# EAGLE board page1 (EAGLE 5.11)
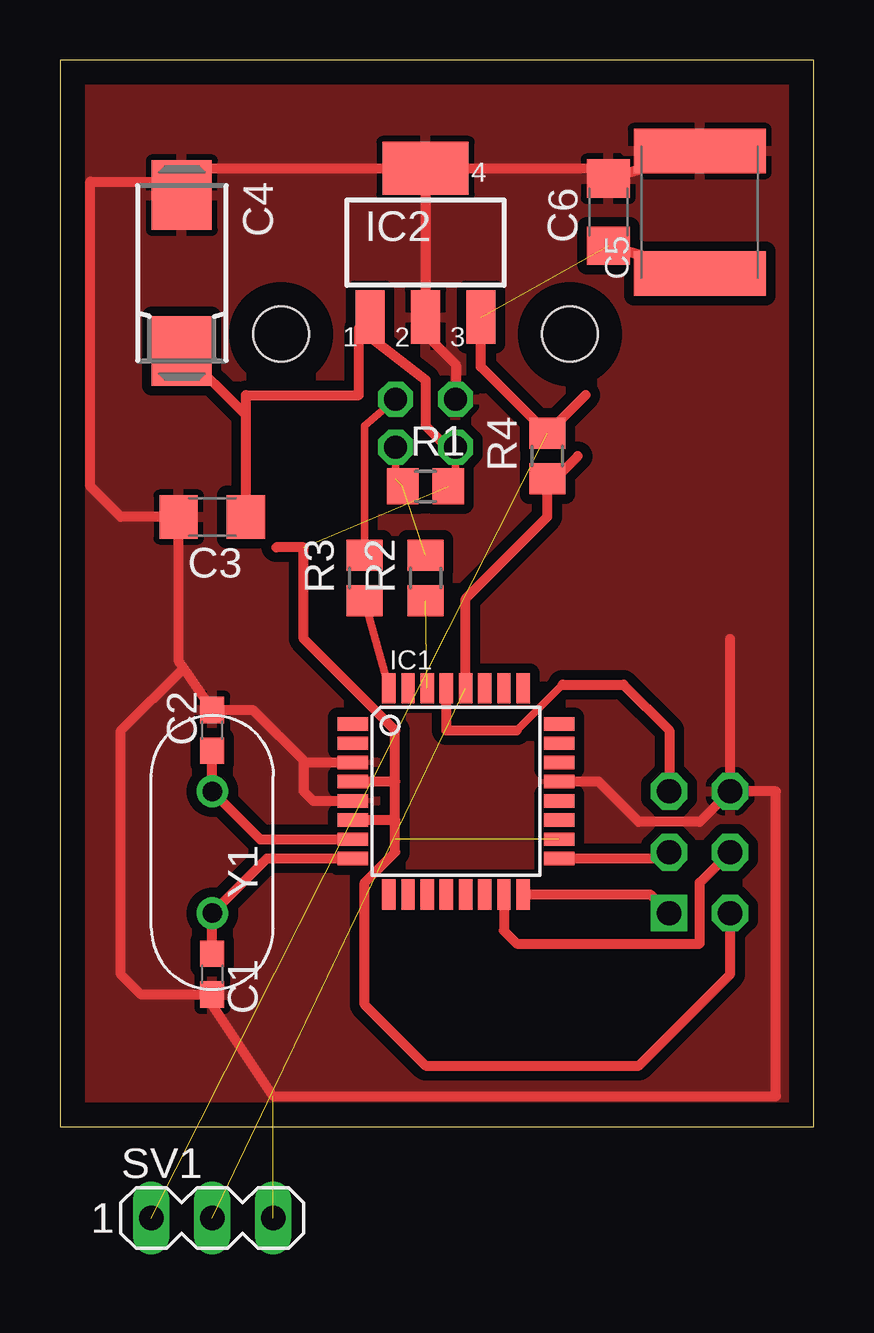
[diagram p0: board, top side]
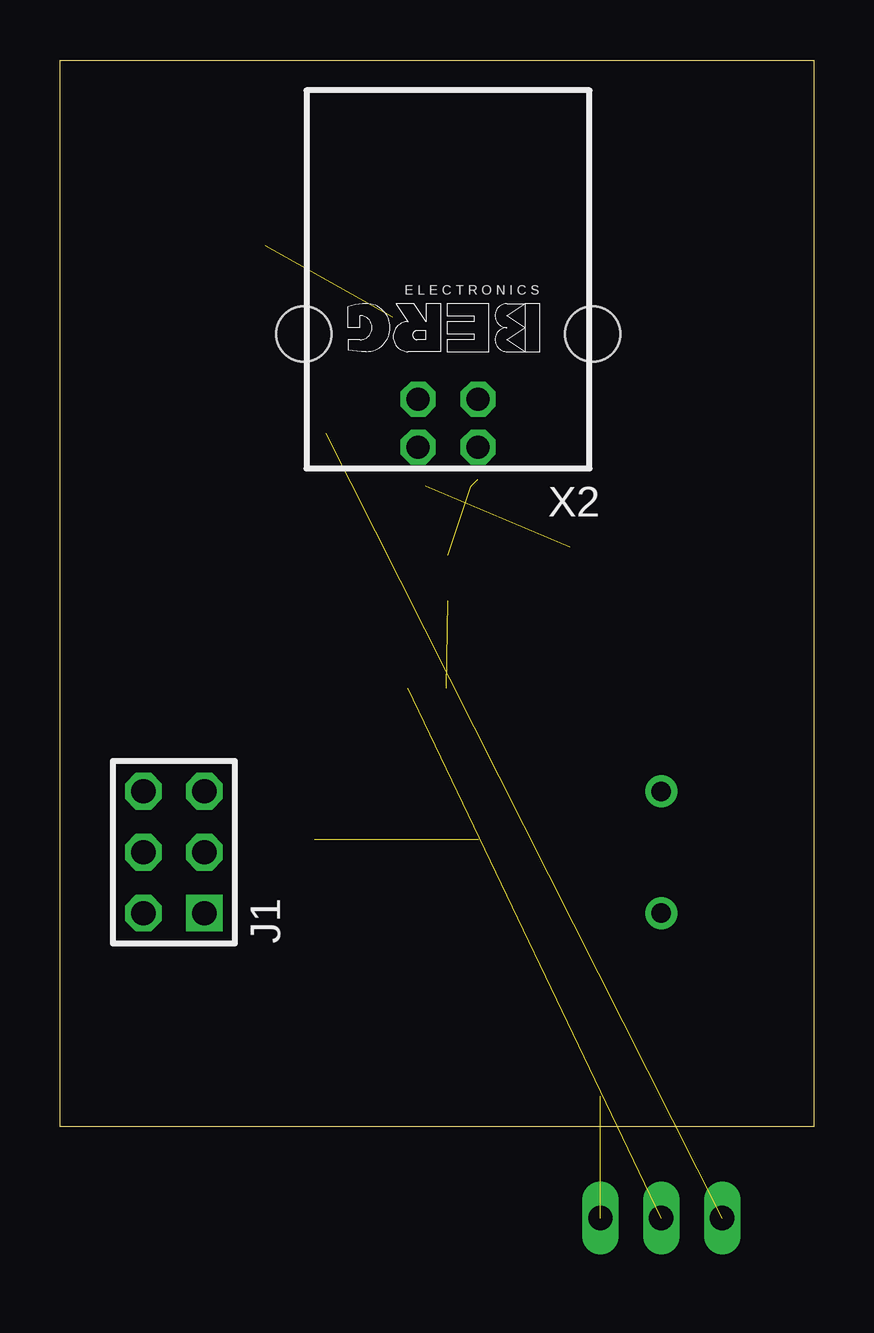
[diagram p1: board, bottom side, seen from below]

Size 31.42 x 44.44 mm. Coordinates in mm from the lower left corner, seen from the top.
Outline: 0,0 31.42,0 31.42,44.44 0,44.44 0,0
Copper layers (1*16): Top 0.035mm / dielectric 1.5mm / Bottom 0.035mm
Design rules "default *": minimum track width 10mil, minimum drill 24mil, track to track 16mil, track to pad 16mil, pad to pad 16mil, via to via 8mil, smd to smd 16mil, copper to edge 40mil, drill to drill 8mil, minimum pad ring 10mil, minimum via ring 8mil, stop-mask expansion 4mil, vias tented up to drill 0mil, thermal gap 10mil

## Footprints (pad centres in the part's own frame; a part is rotated, then mirrored left to right if it is on the bottom)
C0603 = smd 1.1 x 1: 1 -0.85,0; 2 0.85,0
C1206 = smd 1.6 x 1.8: 1 -1.4,0; 2 1.4,0
085CS_1AR = smd 2.9 x 2.5: + 3.25,0; - -3.25,0
C2220K = smd 1.85 x 5.5: 1 -2.55,0; 2 2.55,0
TQFP32-08 = smd 1.27 x 0.559: 1 -4.293,2.8; 2 -4.293,2; 3 -4.293,1.2; 4 -4.293,0.4; 5 -4.293,-0.4; 6 -4.293,-1.2; 7 -4.293,-2; 8 -4.293,-2.8; 17 4.293,-2.8; 18 4.293,-2; 19 4.293,-1.2; 20 4.293,-0.4; 21 4.293,0.4; 22 4.293,1.2; 23 4.293,2; 24 4.293,2.8 | smd 0.559 x 1.27: 9 -2.8,-4.293; 10 -2,-4.293; 11 -1.2,-4.293; 12 -0.4,-4.293; 13 0.4,-4.293; 14 1.2,-4.293; 15 2,-4.293; 16 2.8,-4.293; 25 2.8,4.293; 26 2,4.293; 27 1.2,4.293; 28 0.4,4.293; 29 -0.4,4.293; 30 -1.2,4.293; 31 -2,4.293; 32 -2.8,4.293
SOT223 = smd 1.219 x 2.235: 1 -2.311,-3.099; 2 0,-3.099; 3 2.311,-3.099 | smd 3.6 x 2.2: 4 0,3.099
AVR-ISP-6 = drill 1.016 square: 1 -2.54,-1.27 | drill 1.016 octagon: 2 -2.54,1.27; 3 0,-1.27; 4 0,1.27; 5 2.54,-1.27; 6 2.54,1.27
R0805 = smd 1.3 x 1.5: 1 -0.95,0; 2 0.95,0
MA03-1 = drill 1.016 long: 1 -2.54,0; 2 0,0; 3 2.54,0
PN61729 = drill 0.95 octagon: 1 1.25,4.71; 2 -1.25,4.71; 3 -1.25,2.71; 4 1.25,2.71 | hole 2.3: -6.02,0; 6.02,0
XTAL = drill 0.813 round: P$1 -2.54,0; P$2 2.54,0

## Placement (x,y rotation side)
C1  [C0603]  6.35,6.35 270 top
C2  [C0603]  6.35,16.51 90 top
C3  100n  [C1206]  6.35,25.4 180 top
C4  10uf  [085CS_1AR]  5.08,35.56 270 top
C5  20u  [C2220K]  26.67,38.1 90 top
C6  100n  [C1206]  22.86,38.1 90 top
IC1  MEGA8-AI  [TQFP32-08]  16.51,13.97 0 top
IC2  78M33  [SOT223]  15.24,36.83 0 top
J1  AVR-ISP-6  [AVR-ISP-6]  26.67,11.43 90 bottom
R1  1.5k  [R0805]  15.24,26.67 0 top
R2  68  [R0805]  15.24,22.86 90 top
R3  68  [R0805]  12.7,22.86 90 top
R4  1K  [R0805]  20.32,27.94 90 top
SV1  [MA03-1]  6.35,-3.81 0 top  (outside the outline)
X2  [PN61729]  15.24,33.02 180 bottom
Y1  12Mhz  [XTAL]  6.35,11.43 90 top

## Library data of the parts
C1-C6 R1-R4 = rcl
IC1 = atmel; MPN: ATMEGA8-16AU; OC_FARNELL: 9171371; OC_NEWARK: 73M8863
IC2 = MY_ATMEL
J1 = atmel2
SV1 = con-lstb; OC_FARNELL: unknown; OC_NEWARK: unknown
X2 = con-berg; OC_FARNELL: unknown; OC_NEWARK: unknown
Y1 = dedenbear

## Nets
D+: R3.2 X2.3
D-: R1.1 R2.2 X2.2
GND: C1.2 C2.2 C3.2 C4.- C5.2 C6.2 IC1.3 IC1.5 IC1.21 IC2.2 IC2.4 J1.6 SV1.3 X2.4
MISO: IC1.16 J1.1
MOSI: IC1.15 J1.4
N$1: C3.1 C4.+ IC2.1 X2.1
N$3: C2.1 IC1.7 Y1.P$2
N$4: C1.1 IC1.8 Y1.P$1
N$10: IC1.30 R2.1
N$12: IC1.32 R3.1
N$21: IC1.28 R4.1 SV1.2
RST: IC1.29 J1.5
SCK: IC1.17 J1.3
USB_5V: IC1.4 IC1.6 IC1.18 J1.2 R1.2
V3_3: C5.1 C6.1 IC2.3 R4.2 SV1.1

## Tracks (layer width: path | path; a pad name or v marks a point on that pad's centre or on a via)
D+
  Top 0.305: R3.2 12.7,29.21 X2.3
D-  (2 unrouted)
  Top 0.305: 13.99,26.97 X2.2
GND  (1 unrouted)
  Top 0.305: 6.35,5.08 C1.2
  Top 0.406: IC2.4 5.64,39.93 5.08,39.37 | 5.08,39.37 C4.- 5.08,38.1 | 5.08,39.37 1.27,39.37 1.27,26.67 2.54,25.4 C3.2 4.95,19.39 5.15,19.1 | 5.15,19.1 C2.2 8.04,17.36 10.23,15.17 | 10.23,15.17 IC1.3 | IC1.5 10.56,13.57 10.16,13.97 10.16,15.1 10.23,15.17 | C1.2 3.39,5.5 2.54,6.35 2.54,16.49 5.15,19.1 | J1.6 29.84,13.97 29.84,1.27 8.89,1.27 6.35,5.08 | IC2.4 22.43,39.93 C6.2 C5.2 | IC2.4 IC2.2 15.24,33.02 16.51,31.75 16.51,30.33 X2.4 | J1.6 27.94,20.32 | IC1.21 22.46,14.37 24.13,12.7 26.67,12.7 J1.6
  pour Top: 0,44.45 31.75,44.45 31.75,0 0,0
MISO
  Top 0.406: IC1.16 24.61,9.68 J1.1
MOSI
  Top 0.406: IC1.15 18.51,8.16 19.05,7.62 26.67,7.62 26.67,10.16 J1.4
N$1
  Top 0.305: X2.1 16.49,26.97
  Top 0.406: 12.46,33.26 IC2.1 | 7.75,29.64 C4.+ | C3.1 7.75,29.64 | X2.1 16.14,28.31 15.24,29.21 15.24,31.12 12.46,33.26 | 12.46,33.26 12.46,30.48 7.75,30.48 7.75,29.64
N$3
  Top 0.406: IC1.7 8.35,11.97 Y1.P$2 C2.1
N$4
  Top 0.406: IC1.8 8.63,11.17 Y1.P$1 C1.1
N$10  (1 unrouted)
N$12
  Top 0.305: IC1.32 R3.1
N$21  (1 unrouted)
  Top 0.406: IC1.28 16.91,21.99 20.32,25.4 20.32,26.67 | 20.32,26.67 R4.1 | 20.32,26.67 21.59,27.94
RST
  Top 0.305: 19.05,16.51 20.95,18.41
  Top 0.406: IC1.29 16.11,16.51 19.05,16.51 | 20.95,18.41 23.49,18.41 25.4,16.51 J1.5
SCK
  Top 0.406: IC1.17 25.14,11.17 J1.3
USB_5V  (2 unrouted)
  Top 0.406: 12.29,12.7 arc-90 IC1.6 13.97,12.77 | 9.02,24.13 10.16,24.13 10.16,20.32 13.97,16.51 13.97,14.37 | J1.2 27.94,6.35 24.13,2.54 15.24,2.54 12.7,5.08 12.7,10.16 13.97,11.43 13.97,11.97 13.97,12.7 13.97,12.77 | 13.97,14.37 IC1.4 | 13.97,12.77 13.97,14.37
V3_3  (2 unrouted)
  Top 0.406: C5.1 C6.1 | IC2.3 17.55,31.66 R4.2 21.91,30.48